# Altium PCB FROGSBORO.PcbDoc (part 2 of 3)
Units mm, origin at the board's own origin, x right, y up, seen from the top; angles counter-clockwise.
Board outline 36.5 x 67 mm, 6 copper layers (Top Layer, GND, SIGV, SIGH, Power, Bottom Layer), stack 1.197 mm thick; 116 components, 83 nets, 599 pads, 359 vias.
Unrouted connection lines stored in the file: 50.
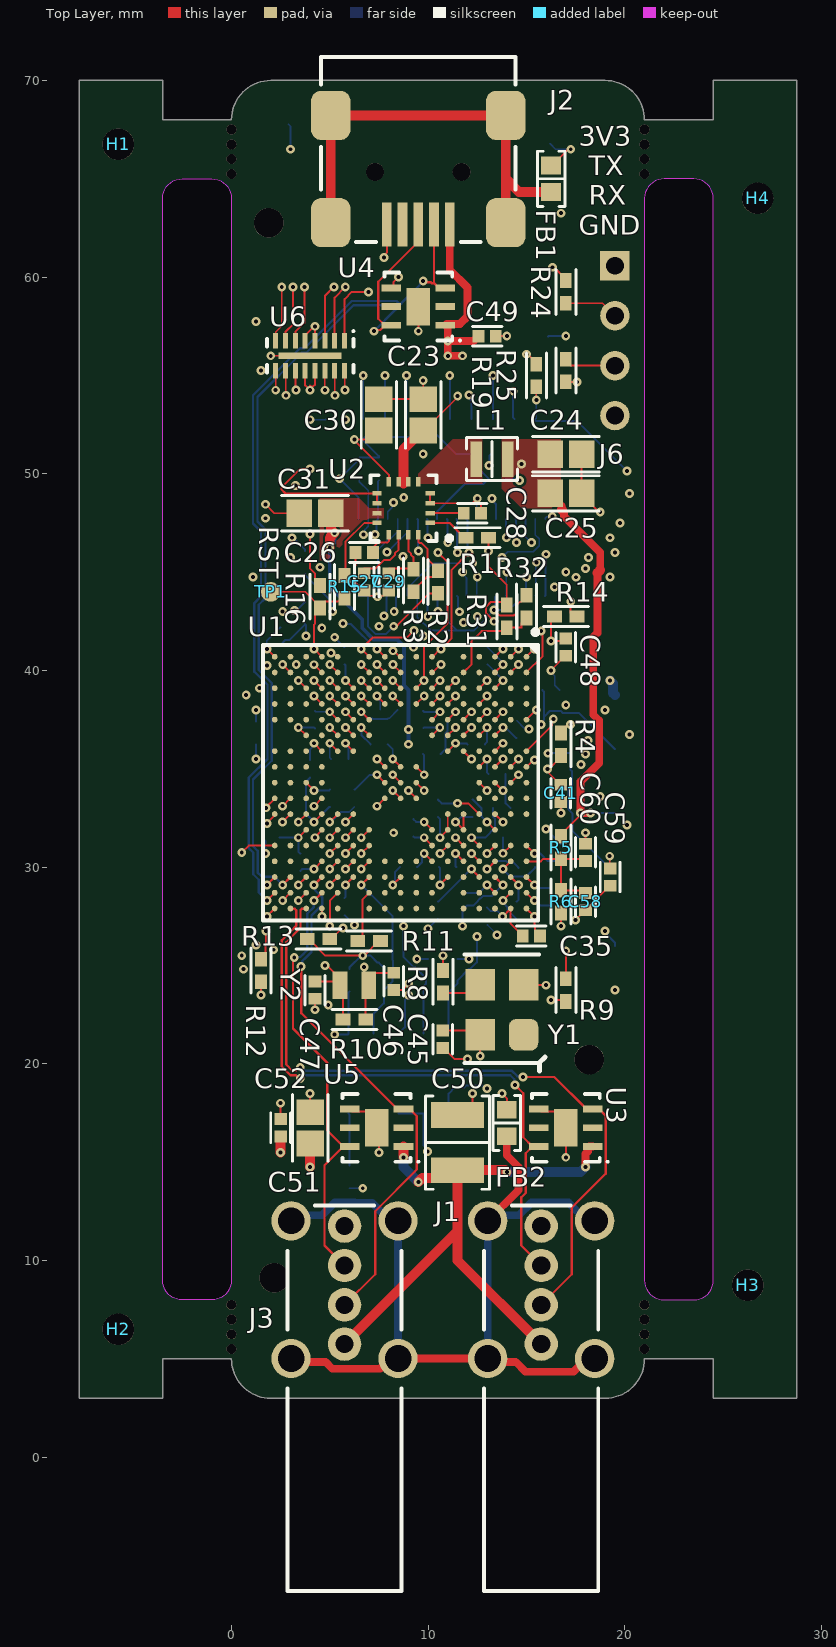
[diagram p0: Top Layer view]

## Part data (continued)
U3 U4 U5: "Dual 1.5-pF, 5.5-V, ±8-kV ESD protection diode with 1-nA max leakage & VCC pin for USB 2.0 6-SON -40 to 85", Capacitance=1.5pF, Clamping Voltage=105.5V, Leakage Current=1nA, Manufacturer="Texas Instruments", Max Operating Temperature=85°C, Min Breakdown Voltage=11V, Min Operating Temperature=-40°C, Operating Supply Voltage=5.5V, Package Quantity=1, Power Line Protection=Yes, Test Current=10mA, Category="Interface ICs", ComponentLink1Description=https://datasheet.ciiva.com/15134/getdatasheetpartid-321682-15134763.pdf?src-supplier=Verical, ComponentLink1URL=https://datasheet.ciiva.com/15134/getdatasheetpartid-321682-15134763.pdf?src-supplier=Verical, ComponentLink2Description=https://datasheet.ciiva.com/1268/1851973-1268376.pdf?src-supplier=Element14, ComponentLink2URL=https://datasheet.ciiva.com/1268/1851973-1268376.pdf?src-supplier=Element14, ComponentLink3Description=https://datasheet.ciiva.com/339/tpd2e001-339042.pdf?src-supplier=Digi-Key, ComponentLink3URL=https://datasheet.ciiva.com/339/tpd2e001-339042.pdf?src-supplier=Digi-Key, ComponentLink4Description=https://datasheet.ciiva.com/339/tpd2e001-339041.pdf?src-supplier=Digi-Key, ComponentLink4URL=https://datasheet.ciiva.com/339/tpd2e001-339041.pdf?src-supplier=Digi-Key, ComponentLink5Description=https://datasheet.ciiva.com/339/tpd2e001-339043.pdf?src-supplier=Digi-Key, ComponentLink5URL=https://datasheet.ciiva.com/339/tpd2e001-339043.pdf?src-supplier=Digi-Key, ComponentLink6Description=https://datasheet.ciiva.com/25955/tpd2e001-25955452.pdf?src-supplier=Avnet+Europe, ComponentLink6URL=https://datasheet.ciiva.com/25955/tpd2e001-25955452.pdf?src-supplier=Avnet+Europe, Contact Plating=Gold, Depth=3mm, Direction=Unidirectional, Element Configuration=Dual, ESD Protection=Yes, Height=0.55mm, Interface=LVDS,USB,Ethernet, Lead Free="Lead Free", Length=3mm, Manufacturer Part Number=TPD2E001DRSR, Max Reverse Leakage Current=1nA, Number of Bidirectional Channels=2, Number of Channels=2, Number of Pins=6, Packaging="Tape and Reel", Pricing 1="1=0.61530, 10=0.52960, 25=0.52440, 100=0.39900, 250=0.39500, 500=0.27490, 1000=0.24620, 1000=0.21900, 2000=0.21460 (USD)", Radiation Hardening=No, REACH SVHC="No SVHC", Reverse Standoff Voltage=5.5V, RoHS=Yes, RoHS Compliant=Yes, Stock 1=1000, Supplier 1="Arrow Electronics", Supplier Part Number 1=TPD2E001DRSR, Termination=SMD/SMT, Width=1.3mm
U6: "ESD Suppressors / TVS Diodes 5V 6-Line AEC-Q100 SLP4016P16", Manufacturer=Semtech, Max Operating Temperature=125°C, Min Operating Temperature=-40°C, Package Quantity=1, Supplier Part Number 1=ECLAMP2410PQTCTCT-ND, Category=Uncategorized, ComponentLink1Description=https://datasheet.ciiva.com/29369/eclamp2410pq-29369285.pdf?src-supplier=Digi-Key, ComponentLink1URL=https://datasheet.ciiva.com/29369/eclamp2410pq-29369285.pdf?src-supplier=Digi-Key, ComponentLink2Description=https://datasheet.ciiva.com/29369/eclamp2410pq-29369287.pdf?src-supplier=Digi-Key, ComponentLink2URL=https://datasheet.ciiva.com/29369/eclamp2410pq-29369287.pdf?src-supplier=Digi-Key, ComponentLink3Description=https://datasheet.ciiva.com/29369/eclamp2410pq-29369288.pdf?src-supplier=Digi-Key, ComponentLink3URL=https://datasheet.ciiva.com/29369/eclamp2410pq-29369288.pdf?src-supplier=Digi-Key, ESD Protection=Yes, Height=0.026inch, Length=0.157inch, Manufacturer Part Number=ECLAMP2410PQTCT, Number of Channels=8, Packaging="Tape and Reel", Pricing 1="1=1.60000, 10=1.42800, 100=1.11320, 500=0.91960, 1000=0.72600 (USD)", RoHS=Yes, RoHS Compliant=Yes, Stock 1=575, Supplier 1=Digi-Key, Width=0.063inch
Y1: "Low-Power Precision CMOS Oscillator 24MHz 1.7V to 3.6V 10ppm 4-Pin Surface Mount T/R", Case/Package=SMD/SMT, Frequency=24MHz, Frequency Stability=10ppm, Load Capacitance=15pF, Manufacturer=Microchip, Max Operating Temperature=85°C, Max Supply Current=6.3mA, Max Supply Voltage=3.6V, Min Operating Temperature=-40°C, Min Supply Voltage=1.7V, Operating Supply Voltage=3.3V, Package Quantity=1000, Ratings=AEC-Q100, Supplier Part Number 1=DSC1001BI5-024.0000T-ND, Category="Timers and Oscillators", ComponentLink1Description=http://www.mouser.com/ds/2/268/DSC1001_Datasheet-775857.pdf?src-supplier=Mouser, ComponentLink1URL=http://www.mouser.com/ds/2/268/DSC1001_Datasheet-775857.pdf?src-supplier=Mouser, ComponentLink2Description=http://www.microchip.com/mymicrochip/filehandler.aspx?ddocname=en576698&src-supplier=Digi-Key, ComponentLink2URL=http://www.microchip.com/mymicrochip/filehandler.aspx?ddocname=en576698&src-supplier=Digi-Key, Height=0.035inch, Length=0.197inch, Manufacturer Part Number=DSC1001BI5-024.0000T, Max Duty Cycle=55%, Mount="Surface Mount", Packaging="Tape and Reel", Pricing 1="1000=1.95000 (USD)", RoHS=Yes, Supplier 1=Digi-Key, Termination=Solder, Width=0.126inch
Y2: library part CMP-2000-05035-1, "Low Profile Crystal, 32.768 KHz, -40 to 85 degC, 2-Pin SMD, RoHS, Tape and Reel", Case Height=0.6mm, Case Length=2mm, Case Width=1.2mm, Frequency=32.768kHz, Frequency Stability=20PPM, Load Capacitance=12.5pF, Manufacturer=ABRACON, Operating Temperature Range=-40Cto+85C, Package / Case=2-SMD, Package Description="2-Pin Surface Mounted Device, Body 2 x 1.2 mm, Height 0.6 mm", Package Reference=ABS06, Brand=ABRACON, Datasheet URL=http://www.mouser.com/ds/2/3/ABS06-10798.pdf, Datasheet Version=Sep-15, Dimensions=1.2mmWx2mmLx0.6mmH, ESR=90kOhms, Factory Pack Quantity=3000, Manufacturer URL=http://www.abracon.com/, Mounting Style=SMD/SMT, Packaging=Reel, Product Category=Crystals, RoHS=Details, Series=ABS06, Termination Style=SMD/SMT, Tolerance=20PPM, Type=LowProfileCrystal

## Free pads (board coordinates)
  round 0.5 hole 0.5 unplated: 1(0,5.5) 1(0,6.25) 1(0,7) 1(0,7.75) 1(0,65.25) 1(0,66) 1(0,66.75) 1(0,67.5) 1(21,5.5) 1(21,6.25) 1(21,7) 1(21,7.75) 1(21,65.25) 1(21,66) 1(21,66.75) 1(21,67.5)
  round 1.5 hole 1.5 unplated: 2(1.896,62.763) 2(2.175,9.125) 2(18.19,20.22)

## Via types
v1: diameter 0.45, hole 0.2, Top Layer to Bottom Layer, tented both sides, 359 vias

## Nets (pads, with @x,y where several pads share a name; then routed paths per layer and width w, separated by ;. In a path a pad name is that pad's centre, name@x,y a point inside that pad or via, vN(x,y) a via of type N, cw(c..) or ccw(c..) an arc to the next point about the centre after c; other vN are vias at no path point)
GND: C1.1 C2.2 C3.2 C4.2 C5.1 C6.2 C7.2 C8.2 C9.1 C10.2 C11.1 C12.2 C13.2 C15.2 C16.2 C17.1 C18.2 C19.2 C20.2 C21.2 C22.2 C23.1 C24.1 C25.1 C26.1 C27.1 C28.1 C29.1 C30.1 C31.1 C32.1 C34.2 C35.2 C36.2 C37.2 C38.2 C39.2 C40.2 C41.1 C42.2 C43.2 C44.2 C45.2 C46.1 C47.1 C48.1 C49.1 C50.1 C51.1 C52.2 C53.2 C54.1 C55.2 C56.2 C57.2 C59.1 C60.2 FB1.1 FB2.1 J1.4 J2.5 J3.4 J4.6 J4.10 J4.S J5.6 J5.9 J5.14 J5.20 J5.25 J5.30 J5.34 J5.39 J6.4 J7.3 J7.5 pad.2 R4.1 R6.1 R9.1 R12.2 R32.1 R33.2 TP2.0 U1.A1 U1.A13 U1.A15 U1.A17 U1.B2 U1.B13 U1.B14 U1.B16 U1.C1 U1.C3 U1.C9 U1.C12 U1.C13 U1.C15 U1.D4 U1.D14 U1.E5 U1.E6 U1.E7 U1.E13 U1.F3 U1.F6 U1.F7 U1.F11 U1.F12 U1.F15 U1.G6 U1.G12 U1.H8 U1.H9 U1.H10 U1.J3 U1.J8 U1.J9 U1.J10 U1.J15 U1.K8 U1.K9 U1.K10 U1.L5 U1.L12 U1.L13 U1.L14 U1.M5 U1.M6 U1.M11 U1.M12 U1.M13 U1.M14 U1.N5 U1.N6 U1.N7 U1.N12 U1.N13 U1.P4 U1.P7 U1.P10 U1.P14 U1.R3 U1.R9 U1.R11 U1.R15 U1.R16 U1.T2 U1.T16 U1.U1 U1.U15 U1.U17 U2.3 U2.4 U3.4 U3.7 U4.4 U4.7 U5.4 U5.7 U6.17 Y1.2 | length 152.3
  Top Layer w0.089: v1(1.734,48.45) 2.184,48 C31.1@3.45,48 ; v1(2,56) U6.17@4,56 ; C26.1@6.31,46.25 6.31,45.331 6.281,45.302 6.281,44.578 6.31,44.549 6.31,44.48 6.474,44.316 6.764,44.316 6.77,44.31 6.77,44.06 7.026,43.804 7.386,43.804 7.44,43.75 7.494,43.804 7.724,43.804 C29.1@8,44.08 ; C30.1@7.5,53.8 C23.1@9.75,53.8 v1(9.75,54.75) ; U2.4@10.1,49 U2.3@10.1,48.5 12.243,48.5 12.493,48.75 v1(12.5,48.75) 12.5,48.652 12.69,48.462 C28.1@12.69,48 ; U1.F12@11,31.9 U1.F11@11,32.7 ; v1(13.348,43.078) 13.609,42.817 13.622,42.817 13.638,42.801 14.362,42.801 14.449,42.888 14.449,43.274 14.669,43.494 14.744,43.494 15,43.75 R32.1@15,43.825 ; v1(16.25,40) 16.25,40.02 16.98,40.75 C48.1@17,40.75 ; v1(16.75,32.75) C41.1@16.75,33.31 ; R4.1@16.75,36.825 16.75,36.9 17.006,37.156 17.058,37.156 17.162,37.259 v1(17.24,37.259) ; C24.1@17.8,51 C25.1@17.8,49 17.8,48.95 18.7,48.05 v1(18.75,48.05) ; C60.2@18,31.19 v1(18,31.75) ; v1(19.231,30.558) v1@19.231,30.519 ; C59.1@19.25,29.94 19.231,29.959 v1@19.231,30.519 ; v1@19.25,30.5 v1@19.231,30.519
  Top Layer w0.102: v1(1.5,23.5) R12.2@1.5,24.175 ; v1(1.8,27.5) U1.U17@2.2,27.9 ; v1(1.8,29.1) U1.U15@2.2,29.5 ; v1(1.8,41.1) U1.U1@2.2,40.7 ; C52.2@2.5,17.19 v1(2.5,18) ; v1(2.606,28.3) 2.606,28.303 3,28.697 U1.T16@3,28.7 ; v1(2.606,40.3) 2.606,40.297 3,39.903 U1.T2@3,39.9 ; v1(3.4,28.3) U1.R16@3.8,28.7 ; v1(3.4,29.1) U1.R15@3.8,29.5 ; v1(3.4,32.3) U1.R11@3.8,32.7 ; v1(3.4,39.5) U1.R3@3.8,39.1 ; U1.R9@3.8,34.3 v1(4.2,33.9) ; C51.1@4,17.55 v1(4,18.5) ; v1(4.2,29.9) U1.P14@4.6,30.3 ; v1(4.2,33.1) U1.P10@4.6,33.5 ; v1(4.2,36.3) U1.P7@4.6,35.9 ; v1(4.2,38.696) 4.202,38.696 U1.P4@4.6,38.3 U1.P4@4.6,38.3 ; v1(4.25,22.75) C47.1@4.25,23.31 ; v1(5,30.7) U1.N13@5.4,31.1 ; v1(5,31.5) U1.N12@5.4,31.9 ; v1(5,36.3) U1.N7@5.4,35.9 ; v1(5,37.1) U1.N6@5.4,36.7 ; v1(5,37.9) U1.N5@5.4,37.5 ; v1(5.8,29.9) U1.M14@6.2,30.3 ; v1(5.8,30.7) U1.M13@6.2,31.1 ; v1(5.8,31.5) U1.M12@6.2,31.9 ; v1(5.8,32.306) 5.803,32.306 6.197,32.7 U1.M11@6.2,32.7 ; v1(5.8,37.1) U1.M6@6.2,36.7 ; v1(5.8,37.9) U1.M5@6.2,37.5 ; U5.4@6.01,17.7 6.134,17.576 6.831,17.576 7.38,17.027 U5.7@7.38,16.75 7.5,16.63 v1(7.5,15.5) ; v1(6.6,29.9) U1.L14@7,30.3 ; v1(6.6,30.7) U1.L13@7,31.1 ; v1(6.6,31.5) U1.L12@7,31.9 ; v1(6.6,37.9) U1.L5@7,37.5 ; v1(7.4,33.1) U1.K10@7.8,33.5 ; v1(7.4,34.7) U1.K9@7.8,34.3 ; v1(7.4,35.5) U1.K8@7.8,35.1 ; v1(7.75,61) 7.75,61.094 7.9,61.244 J2.5@7.9,62.674 ; U4.4@8.13,59.45 8.233,59.553 8.233,59.733 v1(8.5,60) ; v1(8.2,29.1) U1.J15@8.6,29.5 ; v1(8.2,33.9) U1.J10@8.6,33.5 ; v1(8.2,34.7) U1.J9@8.6,34.3 ; v1(8.2,35.5) U1.J8@8.6,35.1 ; v1(8.2,39.5) U1.J3@8.6,39.1 ; C46.1@8.25,23.75 8.68,23.75 9,24.07 v1(9,24.077) ; v1(9,33.9) U1.H10@9.4,33.5 ; U1.H9@9.4,34.3 v1(9.8,33.9) ; U1.H8@9.4,35.1 v1(9.8,34.7) ; v1(9.5,57.25) U4.7@9.5,58.5 ; v1(9.8,32.3) U1.G12@10.2,31.9 ; U1.G6@10.2,36.7 10.2,36.703 10.594,37.097 v1(10.594,37.1) ; v1(10.6,29.1) U1.F15@11,29.5 ; v1(10.6,31.5) U1.F12@11,31.9 ; C45.2@10.75,20.81 10.77,20.81 11.33,20.25 v1(12,20.25) ; U1.F7@11,35.9 v1(11.4,36.3) ; U1.F6@11,36.7 v1(11.4,37.1) ; U1.F3@11,39.1 v1(11.4,39.5) ; v1(11.4,31.5) U1.E13@11.8,31.1 ; C50.1@11.5,17.4 11.651,17.4 12.25,17.999 v1(12.25,18.5) ; U1.E7@11.8,35.9 v1(12.2,35.5) ; U1.E6@11.8,36.7 v1(12.2,37.1) ; U1.E5@11.8,37.5 v1(12.2,37.9) ; v1(12.2,30.7) U1.D14@12.6,30.3 ; U1.D4@12.6,38.3 v1(13,38.7) ; v1(12.994,32.3) 12.997,32.3 13.397,31.9 U1.C12@13.4,31.9 ; v1(13,30.7) U1.C13@13.4,31.1 ; U1.C15@13.4,29.5 v1(13.8,29.1) ; U1.C9@13.4,34.3 v1(13.8,33.9) ; U1.C3@13.4,39.1 v1(13.8,39.5) ; U1.C1@13.4,40.7 v1(13.8,41.1) ; C49.1@13.44,57 v1(14,57) ; v1(13.75,18.5) 14,18.25 FB2.1@14,17.675 ; v1(13.8,28.3) U1.B16@14.2,28.7 ; v1(13.8,29.9) U1.B14@14.2,30.3 ; v1(13.8,30.706) 13.803,30.706 14.197,31.1 U1.B13@14.2,31.1 ; U1.B2@14.2,39.9 v1(14.6,40.3) ; Y1.2@14.85,24.02 14.87,24 v1(16,24) ; U1.A17@15,27.9 v1(15.4,27.5) 15.4,27.075 15.441,27.034 15.441,26.749 C35.2@15.69,26.5 ; U1.A15@15,29.5 v1(15.4,29.1) ; U1.A13@15,31.1 U1.A13@15,31.1 v1(15.4,30.703) v1(15.4,30.703) ; U1.A1@15,40.7 v1(15.4,41.1) ; U3.4@15.63,17.7 15.754,17.576 16.451,17.576 17,17.027 U3.7@17,16.75 v1(17,15.25) ; v1(16.25,23.25) 16.925,23.25 R9.1@17,23.175 ; FB1.1@16.25,65.675 16.3,65.675 17.058,66.433 17.183,66.433 v1(17.25,66.5) ; v1(16.75,27) R6.1@16.75,27.675
  Bottom Layer w0.089: C17.1@1.56,31.5 1.742,31.318 v1(1.742,30.69) ; v1(1.8,41.1) 1.8,41.51 2.48,42.19 C11.1@2.5,42.19 ; J4.S@2.9,67.775 3,67.675 v1(3,66.5) ; C22.2@4,35.44 4,36.002 4.2,36.202 v1(4.2,36.3) ; v1(4,52.75) 4.775,52.75 J4.S@4.8,52.775 ; C20.2@4.25,37.94 4.29,37.9 v1(5,37.9) ; v1(5,36.3) 5,35.56 C55.2@5.06,35.5 ; v1(5.25,41.69) 5.25,41.67 5.73,41.19 C15.2@5.75,41.19 ; C12.2@5.75,27.56 5.77,27.56 6.25,27.08 v1(6.25,27.06) ; R33.2@6,13.675 v1(6.675,13.675) ; v1(6.6,37.9) 6.925,37.575 7.154,37.575 7.198,37.531 7.922,37.531 7.966,37.575 8.035,37.575 8.44,37.98 C13.2@8.44,38 ; v1(7.427,43.75) J5.6@7.427,43.8 ; J5.6@7.45,43.8 7.45,46.137 7.945,46.632 8.015,46.632 8.45,47.067 J5.9@8.45,47.7 ; C2.2@7.94,36.25 8.196,35.994 8.196,35.863 8.2,35.858 v1(8.2,35.5) ; J5.14@9.45,43.8 9.45,42.715 10.128,42.037 11.463,42.037 ; C4.2@9.75,37.06 9.79,37.1 v1(10.594,37.1) ; v1(10,26.873) 10,26.89 10.48,27.37 C5.1@10.5,27.37 ; J5.20@10.95,43.8 10.95,42.55 11.463,42.037 ; v1(11.75,27) C7.2@11.75,27.81 ; v1(12.077,54.008) 12.146,53.939 12.146,53.756 12.2,53.702 J4.6@12.2,52.775 ; J5.25@12.45,47.7 12.475,47.725 12.475,48.725 v1(12.5,48.75) ; C34.2@13,27.06 13.02,27.06 13.5,26.58 v1(13.5,26.56) ; C16.2@13,40.31 13.02,40.31 13.8,39.53 v1(13.8,39.5) ; v1(13.102,50.422) 13.102,50.912 C53.2@13.19,51 ; J5.30@13.45,43.8 13.399,43.749 13.399,43.101 v1@13.422,43.078 ; C54.1@13.94,49.75 14.45,49.75 14.545,49.655 v1(14.643,49.655) ; J5.34@14.45,43.8 14.45,43.425 14.103,43.078 v1@13.422,43.078 ; C10.2@14.5,37.44 14.52,37.44 14.87,37.09 15.064,37.09 v1(15.133,37.021) v1@15.154,37 ; J5.39@15.95,47.7 15.95,47.74 16.031,47.821 v1(16.313,47.821) ; J4.S@16.1,56.975 16.125,57 v1(17,57) ; J4.10@16.1,63.175 16.175,63.25 v1(16.75,63.25) ; J4.S@16.2,66.775 16.475,66.5 v1(17.25,66.5) ; v1(16.25,40) 16.25,39.902 16.434,39.718 16.434,39.256 C9.1@16.69,39 ; v1(17.24,37.259) 17.24,36.7 C1.1@17.25,36.69 ; 11.463,42.037 12.347,42.037 12.896,42.586 12.896,42.626 v1(13.348,43.078) v1@13.422,43.078
  Bottom Layer w0.102: C18.2@3.5,29.81 3.59,29.9 v1(4.2,29.9) ; v1(4.2,33.9) 4.96,33.9 C21.2@5,33.94 ; C19.2@6.25,33.94 6.27,33.94 7.023,34.693 7.393,34.693 v1(7.4,34.7) ; v1(8.2,29.1) 8.2,29.194 8.311,29.305 8.311,29.751 C8.2@8.56,30 ; J7.5@8.5,17.465 J7.3@9.77,17.465 9.77,15.845 9.969,15.646 v1(9.969,15.552) ; C40.2@9.25,32.44 9.39,32.3 v1(9.8,32.3) ; C57.2@9.75,35.75 9.8,35.7 v1(9.8,34.7) ; C36.2@10.5,32.56 10.6,32.46 v1(10.6,31.5) ; C39.2@10.56,30 10.6,29.96 v1(10.6,29.1) ; v1(11.4,36.3) 11.95,36.3 C3.2@12,36.25 ; C7.2@11.75,27.81 11.999,28.059 12.309,28.059 12.524,28.274 12.524,28.305 12.615,28.396 12.646,28.396 12.796,28.546 13.246,28.546 v1(13.8,29.1) ; C38.2@12.25,33.44 12.27,33.44 12.726,32.984 12.726,32.574 12.994,32.306 v1(12.994,32.3) ; v1(13.8,28.3) 13.867,28.233 13.867,28.133 14.024,27.976 14.024,27.826 14.48,27.37 C43.2@14.5,27.37 ; v1(13.8,29.9) 14.175,29.525 14.195,29.525 ; v1(13.8,30.706) C37.2@13.8,31.5 ; C44.2@13.94,34.75 13.94,34.134 13.8,33.994 v1(13.8,33.9) 13.8,33.806 13.941,33.665 13.941,33.249 C6.2@14.19,33 ; 14.195,29.524 14.925,29.524 ; 14.925,29.525 14.985,29.525 15.44,29.98 C56.2@15.44,30 ; v1(15.4,29.1) 15.494,29.1 15.654,28.94 C42.2@16.25,28.94 ; v1(15.4,30.703) 15.417,30.686 15.714,30.686 16.09,30.31 C32.1@16.75,30.31 ; v1(19,26.75) 19,26.656 19.5,26.156 TP2.0@19.5,26
NetC21_1: C21.1 C22.1 U1.P11 | length 4.2
  Top Layer w0.102: v1(4.2,32.3) U1.P11@4.6,32.7
  Bottom Layer w0.102: C22.1@4,34.56 3.797,34.357 3.797,32.703 v1(4.2,32.3) 4.22,32.3 4.98,33.06 C21.1@5,33.06
NetC26_2: C26.2 U2.13 | length 1.3
  Top Layer w0.102: C26.2@7.19,46.25 7.439,46.499 7.926,46.499 8,46.573 U2.13@8,46.9
NetC27_2: C27.2 U2.14 | length 3
  Top Layer w0.102: C27.2@6.75,45.19 7.326,45.19 7.766,45.63 8.073,45.63 8.309,45.866 8.309,45.951 8.5,46.142 U2.14@8.5,46.9
NetC28_2: C28.2 U2.2 | length 1.7
  Top Layer w0.102: U2.2@10.1,48 C28.2@11.81,48
NetC29_2: C29.2 R3.1 U2.15 | length 3.1
  Top Layer w0.102: C29.2@8,45.19 9.21,45.19 R3.1@9.25,45.15 9.25,45.758 9.119,45.888 9.119,45.955 9,46.074 U2.15@9,46.9
NetC41_2: C41.2 R4.2 U1.C8 | length 5.1
  Top Layer w0.089: C41.2@16.75,34.19 16.73,34.19 16.144,34.776 16.144,34.931 v1(16.075,35) 16.15,35 16.75,35.6 R4.2@16.75,35.675
  Top Layer w0.102: U1.C8@13.4,35.1 v1(13.8,35.5)
  SIGH w0.089: v1(13.8,35.5) 14.196,35.104 14.757,35.104 14.861,35 v1(16.075,35)